# Altium PCB rpi_adapter_mipi_in_out.PcbDoc (part 1 of 2)
Units mil, origin at the board's own origin, x right, y up, seen from the top; angles counter-clockwise.
Board outline 1339.12 x 1250 mil, 4 copper layers (Top Layer, L02_GND, L03_GND, Bottom Layer), stack 36.268 mil thick; 12 components, 26 nets, 96 pads, 205 vias.
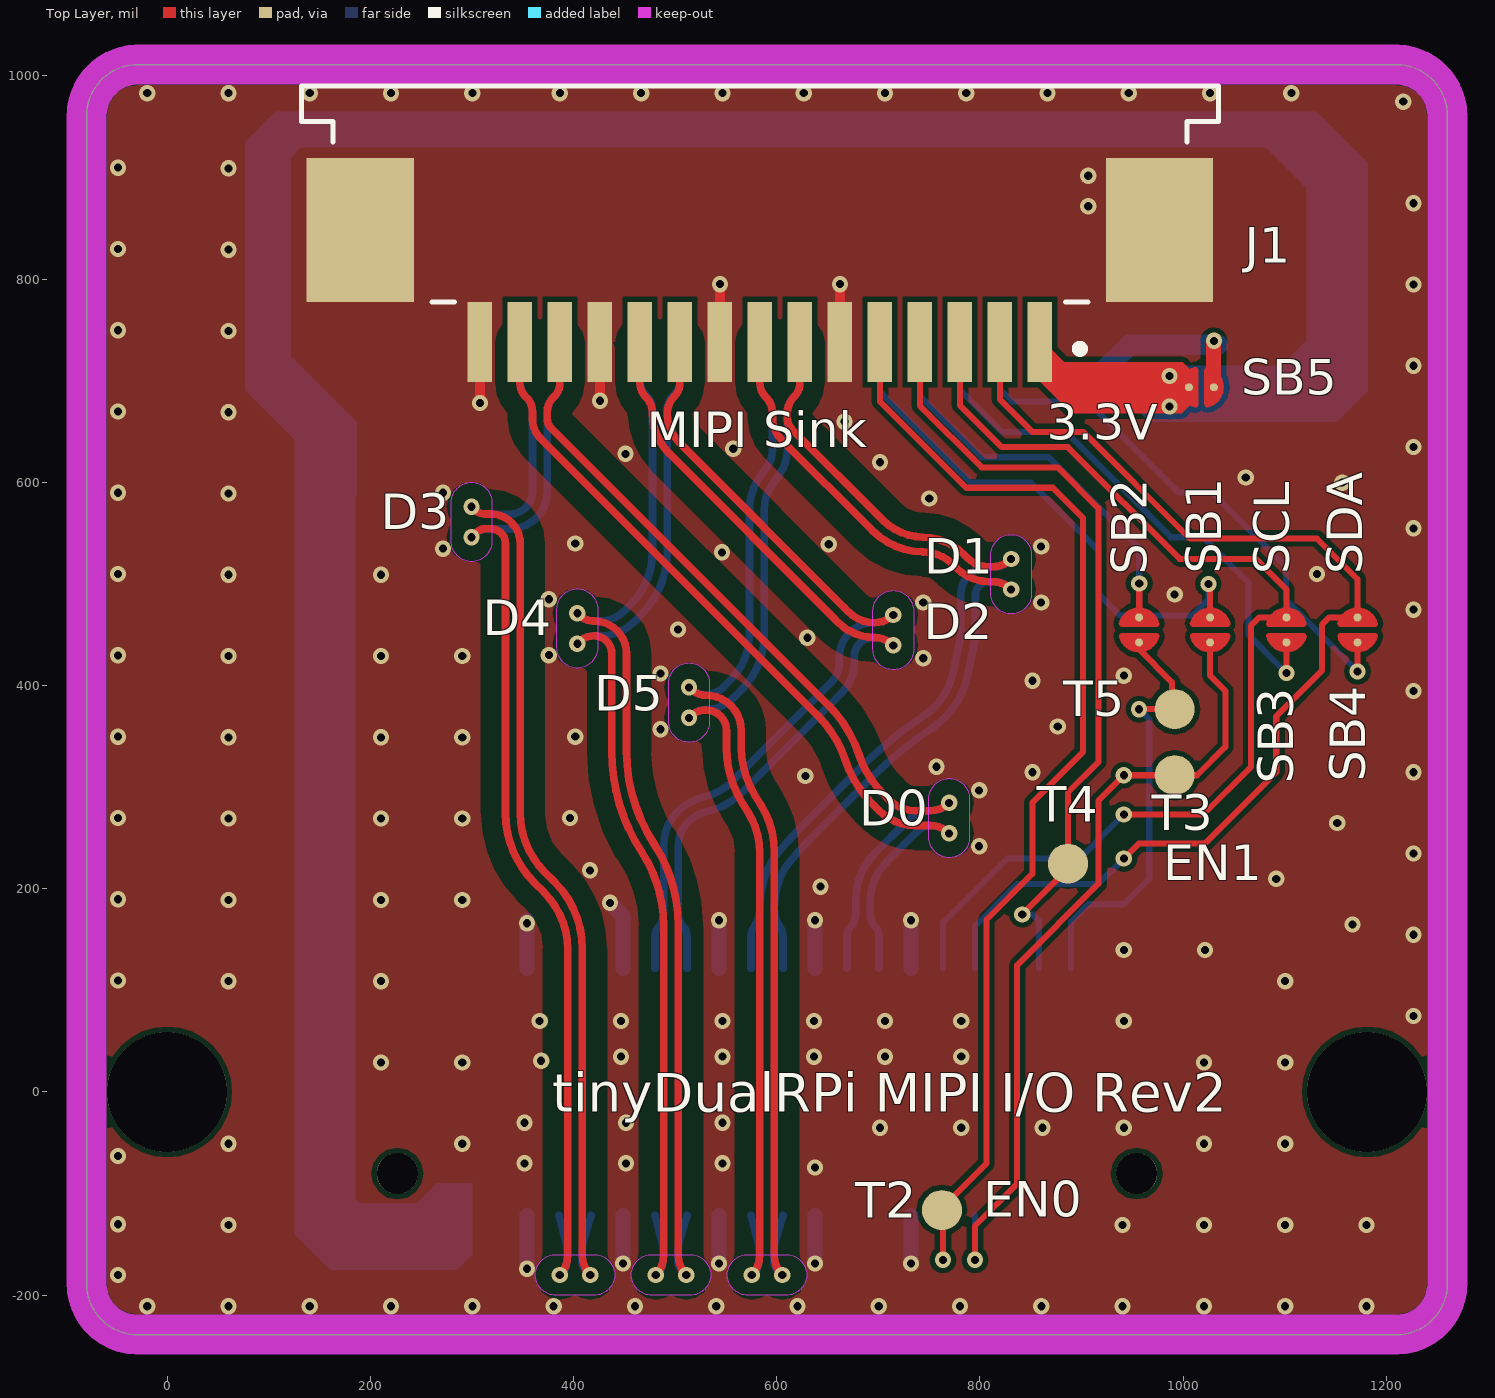
[diagram p0: Top Layer view]
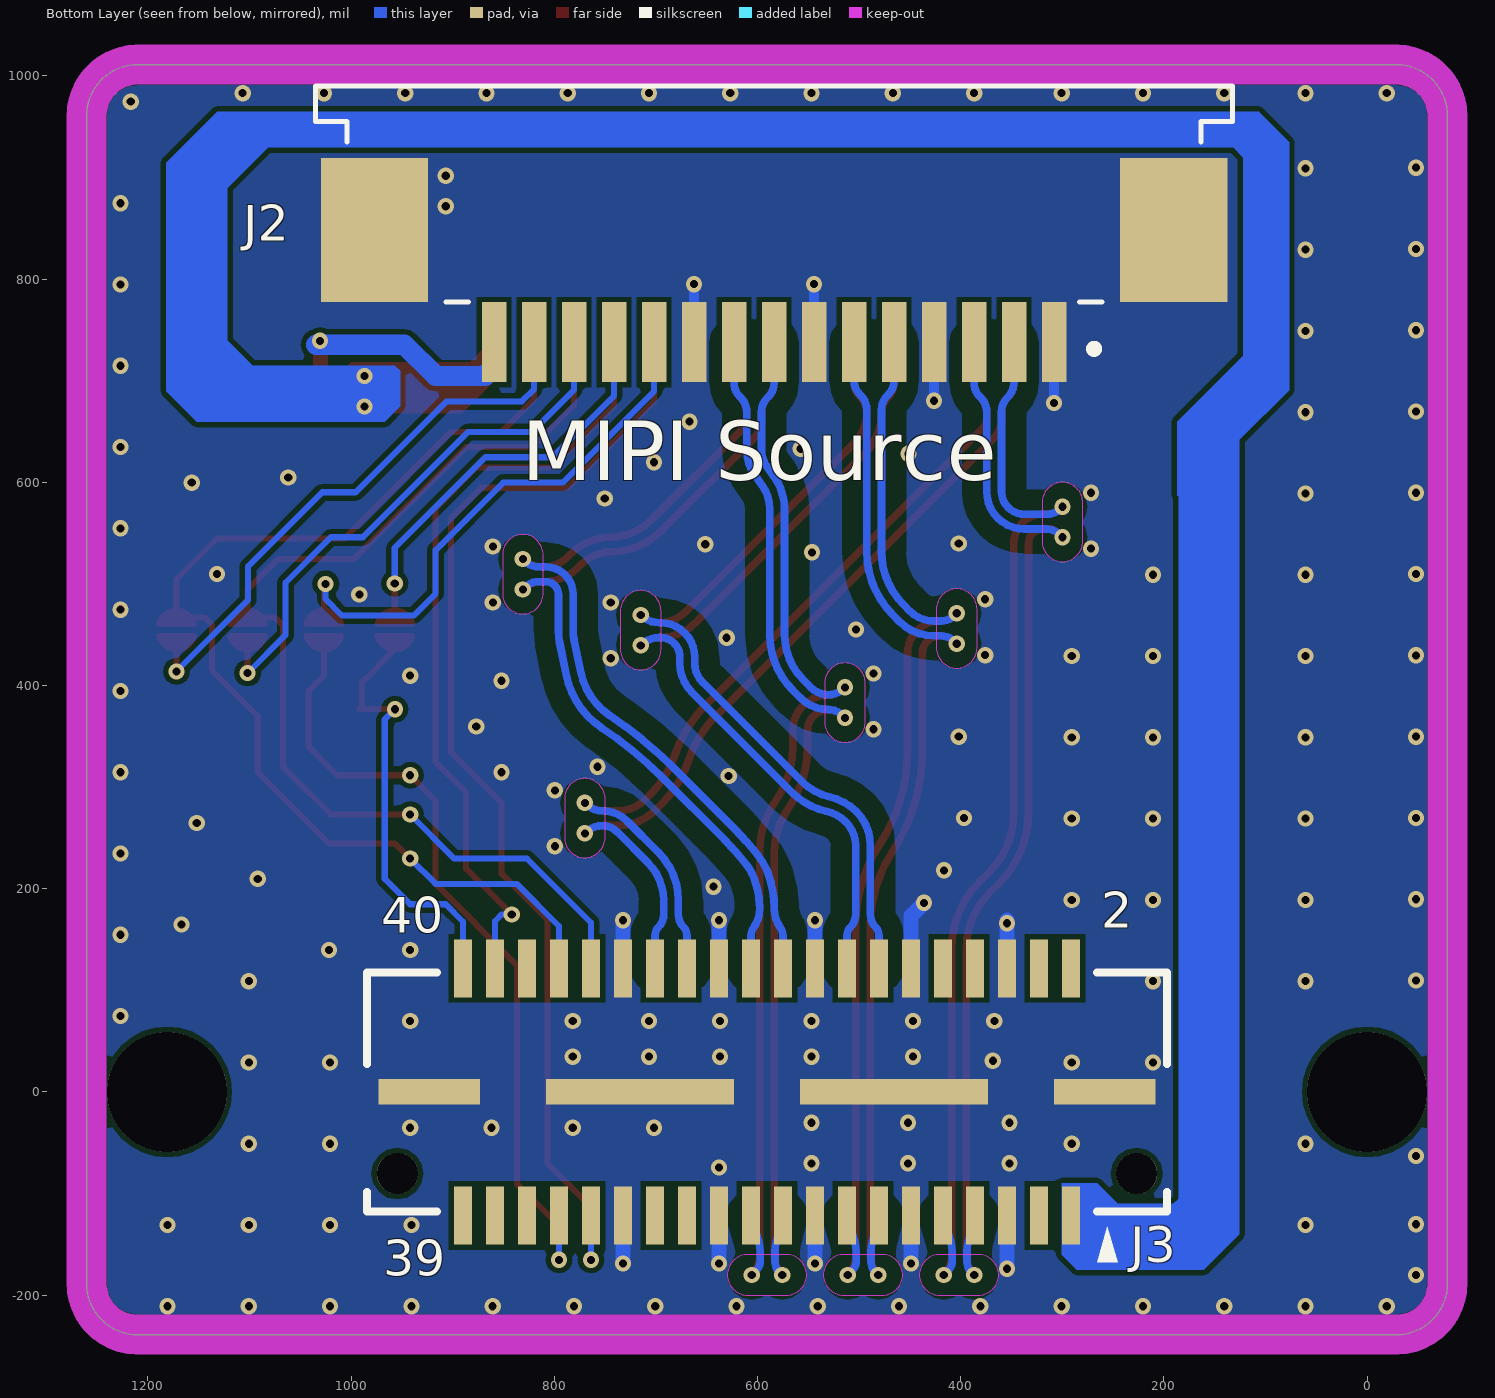
[diagram p1: Bottom Layer view, seen from below]
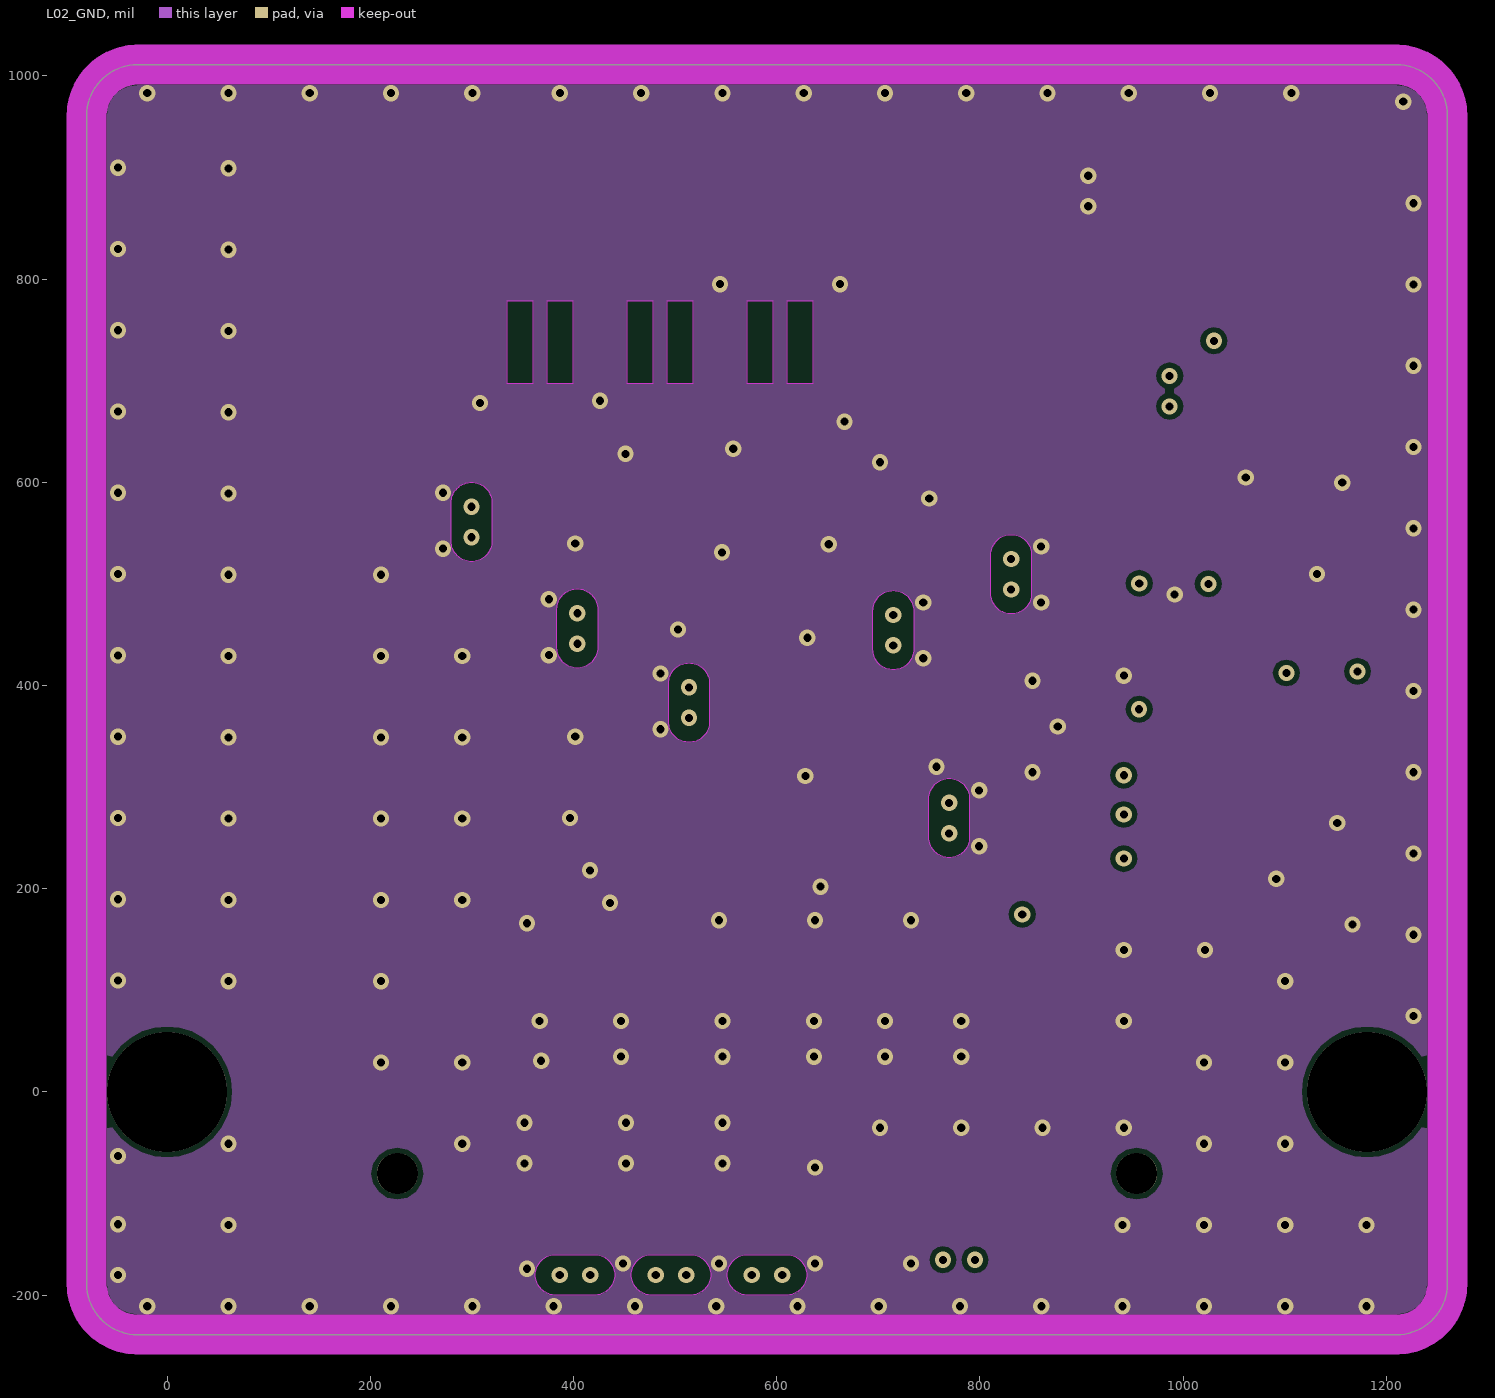
[diagram p2: L02_GND]
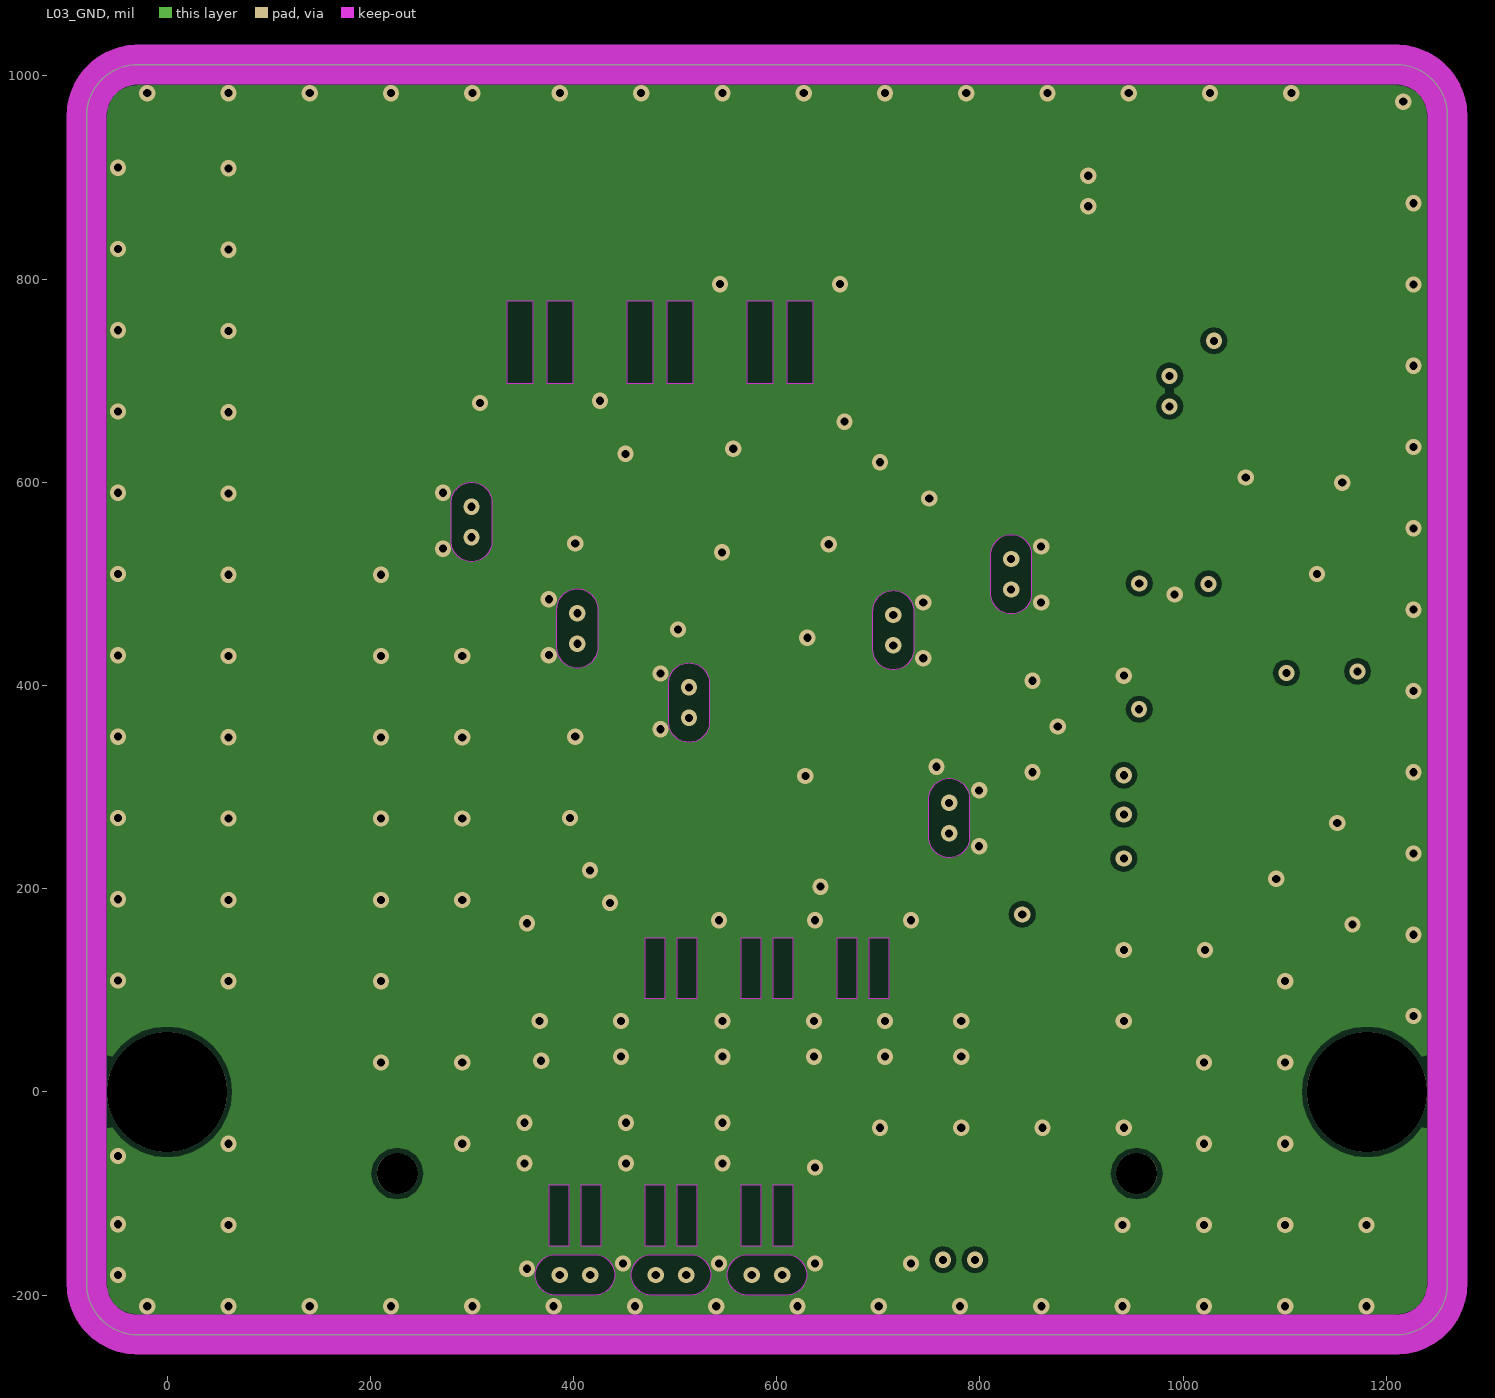
[diagram p3: L03_GND]

## Layer stack, top to bottom
Top Solder: solder mask 1, SM-001, Dk 4
Top Layer: signal copper 1.378
Dielectric 1: prepreg 8.2835, 7628*1, Dk 4.05
L02_GND: signal copper 0.5984
Dielectric 2: core 15.748, Core, Dk 4.05
L03_GND: signal copper 0.5984
Dielectric 3: prepreg 8.2835, 7628*1, Dk 4.05
Bottom Layer: signal copper 1.378
Bottom Solder: solder mask 1, SM-001, Dk 4

## Board outline
-79.01,-188.99 ccw(c-29.01,-188.99) -29.01,-238.99 1210.11,-238.99 ccw(c1210.11,-188.99) 1260.11,-188.99 1260.11,961.01 ccw(c1210.11,961.01) 1210.11,1011.01 -29.01,1011.01 ccw(c-29.01,961.01) -79.01,961.01

## Design rules (kind name [scope] priority, off if disabled: settings)
BoardOutlineClearance [(IsPolygon OR IsTrack) AND IsNet] p1: gap=20 ignorepadtopadclearanceinfootprint=FALSE
Clearance Clearance_MIPI [InNetClass('MIPI')] p1: gap=5 ignorepadtopadclearanceinfootprint=TRUE except(20: Arc-Poly Track-Poly)
Clearance Clearance_Keepout [IsKeepOut] p2: gap=0.01 ignorepadtopadclearanceinfootprint=TRUE
Clearance Clearance_Poly [(IsTrack or IsArc) and InAnyDifferentialPair vs InNet('GND')    and InPoly] p3: gap=25 ignorepadtopadclearanceinfootprint=TRUE
Clearance Clearance_FID [InComponent('Designator1') OR InComponent('Designator2') OR InComponent('Designator3') OR InComponent('Designator4') OR InComponent('Designator5') OR InComponent('Designator6')] p4: gap=6 ignorepadtopadclearanceinfootprint=TRUE except(0: Arc-Arc; 5: Arc-Fill Arc-Poly Arc-Region Track-Fill Track-Poly Track-Region SMDPad-Fill SMDPad-Poly SMDPad-Region Via-Fill Via-Poly Via-Region; 5.98: Arc-Track)
Clearance [All] p5: gap=5 ignorepadtopadclearanceinfootprint=TRUE
ComponentClearance [All] p1 off: gap=5 collisioncheckmode=3 verticalgap=10 showdistances=FALSE
DiffPairsRouting [All] p1: maxlimit=7 minlimit=7 mostfreqgap=7 toplayer_minwidth=7.55 toplayer_maxwidth=7.55 toplayer_prefwidth=7.55 midlayer1_minwidth=7.55 midlayer1_maxwidth=7.55 midlayer1_prefwidth=7.55 midlayer2_minwidth=7.55 midlayer2_maxwidth=7.55 midlayer2_prefwidth=7.55 bottomlayer_minwidth=7.55 bottomlayer_maxwidth=7.55 bottomlayer_prefwidth=7.55 maxuncoupledlength=500
Height [All] p1 off: minheight=0 maxheight=1000 prefheight=500
HoleSize [All] p1: absolutevalues=TRUE maxlimit=120 minlimit=1 maxpercent=80.000 minpercent=20.000
MatchedLengths MatchedLengths_CAM [InDifferentialPairClass('CAM0') or InDifferentialPairClass('CAM1')] p1: tolerance=5 checknetsindiffpair=TRUE checkdiffpairvsdiffpair=FALSE checkxsignals=FALSE checkothers=FALSE
MinimumSolderMaskSliver [All] p1: minsoldermaskwidth=1.5
PlaneClearance [All] p1: clearance=10
PolygonConnect PolygonConnect_1 [InNet('VDD_IR')] p1: connectstyle=Direct reliefconductorwidth=10 reliefentries=4 polygonreliefangle="90 Angle" airgapwidth=10
PolygonConnect [All] p2: thpad.connectstyle=Relief thpad.reliefconductorwidth=10 thpad.reliefentries=4 thpad.polygonreliefangle="90 Angle" thpad.airgapwidth=10 smdpad.connectstyle=Direct smdpad.reliefconductorwidth=10 smdpad.reliefentries=4 smdpad.polygonreliefangle="90 Angle" smdpad.airgapwidth=10 via.connectstyle=Direct via.reliefconductorwidth=10 via.reliefentries=4 via.polygonreliefangle="90 Angle" via.airgapwidth=10
RoomDefinition rpi_adapter_mipi_in_out [InComponentClass('rpi_adapter_mipi_in_out')] p1 off: confinementstyle=ConfineIn formatcopy=TRUE lockcomponents=FALSE outline 423.28,-538.96 3809.28,-538.96 3809.28,1510.04 423.28,1510.04
RoutingVias [All] p1: holewidth=8 width=16 viastyle="Through Hole" minholewidth=8 minwidth=16 maxholewidth=8 maxwidth=16
ShortCircuit [IsNet] p1: allowed=FALSE
SilkToSilkClearance [All] p1: silktosilkclearance=1
SilkToSolderMaskClearance [IsPad] p1: minsilkscreentomaskgap=1 clearancetoexposedcopper=TRUE
SolderMaskExpansion SolderMaskExpansion_via [IsVia] p1: expansion=3 istentingtop=FALSE
SolderMaskExpansion [All] p2: expansion=2.5 istentingtop=FALSE
Width [All] p1: maxlimit=50 minlimit=6 preferedwidth=6
21 further rules are at their usual default settings.

## Classes and differential pairs
differential pair class MIPI: MIPI_CLK MIPI_D0 MIPI_D1
net class MIPI: DIFF0_N DIFF0_P DIFF1_N DIFF1_P DIFF2_N DIFF2_P DIFF3_N DIFF3_P DIFF4_N DIFF4_P DIFF5_N DIFF5_P
differential pair DIFF5: +DIFF5_P -DIFF5_N
differential pair DIFF4: +DIFF4_P -DIFF4_N
differential pair DIFF3: +DIFF3_P -DIFF3_N
differential pair DIFF2: +DIFF2_P -DIFF2_N
differential pair DIFF1: +DIFF1_P -DIFF1_N
differential pair DIFF0: +DIFF0_P -DIFF0_N
differential pair MIPI_D1: +"" -""
differential pair MIPI_D0: +"" -""
differential pair MIPI_CLK: +"" -""

## Components (designator, comment, footprint, x,y, rotation, side; value= is the part's Value field where it differs from the comment)
J1 "1-84953-5" TE_1-84953-5 583.56,738.02 r180 top
J2 "1-84953-5" TE_1-84953-5 583.56,738.02 r0 bottom
J3 "QTE-020-01-F-D-A-K" SAMTEC_QTE-020-01-X-D-A 590.55,0 r0 bottom locked
SB1 "Solderbridge" Solderbridge 1026.77,454.68 r90 top
SB2 "Solderbridge" Solderbridge 956.77,454.68 r90 top
SB3 "Solderbridge" Solderbridge 1101.77,454.68 r270 top
SB4 "Solderbridge" Solderbridge 1171.77,454.68 r270 top
SB5 "Solderbridge" Solderbridge 1018.11,693.59 r0 top
T2 "TP_S" "TP 1mm" 762.77,-116.32 r0 top
T3 "TP_S" "TP 1mm" 991.77,311.68 r0 top
T4 "TP_S" "TP 1mm" 886.77,224.68 r0 top
T5 "TP_S" "TP 1mm" 991.77,376.68 r0 top

## Footprints (in the part's own frame and the unit in brackets; to place one, negate y for a bottom-side part, rotate by r counter-clockwise, add the part's x,y. Pads: shape width x height; smd on the part's side, far side on the other; paste and mask are expansions set on the pad)
SAMTEC_QTE-020-01-X-D-A [mm]
  rect 0.46x1.45 smd: 01(-7.6,3.09) 02(-7.6,-3.09) 03(-6.8,3.09) 04(-6.8,-3.09) 05(-6,3.09) 06(-6,-3.09) 07(-5.2,3.09) 08(-5.2,-3.09) 09(-4.4,3.09) 10(-4.4,-3.09) 11(-3.6,3.09) 12(-3.6,-3.09) 13(-2.8,3.09) 14(-2.8,-3.09) 15(-2,3.09) 16(-2,-3.09) 17(-1.2,3.09) 18(-1.2,-3.09) 19(-0.4,3.09) 20(-0.4,-3.09) 21(0.4,3.09) 22(0.4,-3.09) 23(1.2,3.09) 24(1.2,-3.09) 25(2,3.09) 26(2,-3.09) 27(2.8,3.09) 28(2.8,-3.09) 29(3.6,3.09) 30(3.6,-3.09) 31(4.4,3.09) 32(4.4,-3.09) 33(5.2,3.09) 34(5.2,-3.09) 35(6,3.09) 36(6,-3.09) 37(6.8,3.09) 38(6.8,-3.09) 39(7.6,3.09) 40(7.6,-3.09)
  rect 2.54x0.64 smd: G1(-8.445,0) G4(8.445,0)
  rect 4.7x0.64 smd: G2(-3.175,0) G3(3.175,0)
  round 1.02 hole 1.02 unplated: ""(-9.24,2.04) ""(9.24,2.04)
  silkscreen extent -10,-2.98 10,4.25, body extent -10.01,-3.56 10.01,3.56, height 4.26
Solderbridge [mm]
  round 0.2 smd paste-10: 1(-0.312,0) 2(0.312,0)
  Top Layer region: 0.077,0.432 0.152,0.505 0.271,0.467 0.335,0.424 0.409,0.351 0.462,0.292 0.521,0.193 0.549,0.099 0.544,-0.122 0.518,-0.193 0.434,-0.33 0.351,-0.411 0.259,-0.469 0.157,-0.5 0.107,-0.483 0.077,-0.43
  Top Layer region: -0.077,-0.432 -0.152,-0.505 -0.271,-0.467 -0.335,-0.424 -0.409,-0.351 -0.462,-0.292 -0.521,-0.193 -0.549,-0.099 -0.544,0.122 -0.518,0.193 -0.434,0.33 -0.351,0.411 -0.259,0.469 -0.157,0.5 -0.107,0.483 -0.077,0.43
  Top Layer lines w0.152: -0.153,0.431 ccw(c-0.042,0) -0.487,0 ccw(c-0.042,0) -0.153,-0.431 ; 0.153,0.431 cw(c0.042,0) 0.153,-0.431
TE_1-84953-5 [mm]
  rect 0.61x2 smd: 1(-7,0) 2(-6,0) 3(-5,0) 4(-4,0) 5(-3,0) 6(-2,0) 7(-1,0) 8(0,0) 9(1,0) 10(2,0) 11(3,0) 12(4,0) 13(5,0) 14(6,0) 15(7,0)
  rect 2.68x3.6 smd: M1(-9.99,-2.8) M2(9.99,-2.8)
  silkscreen extent -11.46,-6.4 11.46,0.27, body extent -11.46,-6.4 11.46,0.15, height 2.56
"TP 1mm" [mm] "1 mm Probe Pad"
  round 1 smd: 1(0,0)

## Part data
J1 J2: library part "FPC - 15P - 2MP", "Conn FPC Connector SKT 15 POS 1mm Solder RA SMD T/R", Actuator Color=Black, Contact Current Rating=1A, Flammability Rating="UL94 V-0", Housing Color=Natural, Manufacturer="TE Connectivity", Max Operating Temperature=85°C, Max Voltage Rating (AC)=200V, Min Operating Temperature=-40°C, Package Quantity=1200, Supplier Part Number 1=A101405CT-ND, Actuator Material=Nylon,Glass,Polyamide, Category="FFC / FPC", ComponentLink1Description=https://datasheet.ciiva.com/669/eng-cd-84953-a3-669110.pdf?src-supplier=Digi-Key, ComponentLink1URL=https://datasheet.ciiva.com/669/eng-cd-84953-a3-669110.pdf?src-supplier=Digi-Key, ComponentLink2Description=https://datasheet.ciiva.com/669/eng-cd-84953-a3-669111.pdf?src-supplier=Digi-Key, ComponentLink2URL=https://datasheet.ciiva.com/669/eng-cd-84953-a3-669111.pdf?src-supplier=Digi-Key, ComponentLink3Description=https://datasheet.ciiva.com/669/eng-cd-84953-a3-669112.pdf?src-supplier=Digi-Key, ComponentLink3URL=https://datasheet.ciiva.com/669/eng-cd-84953-a3-669112.pdf?src-supplier=Digi-Key, Connector System=Flex-to-Board, Connector Type=Receptacle,Connector,Socket, Contact Location=Top, Contact Material=Bronze, Contact Plating=Tin,Bright, Current Rating=1A, Depth=7.3mm, ELV=Compliant, Gender=Receptacle, Height=2.56mm, Housing Material=Polymer, Length=22.92mm, Manufacturer Part Number=1-84953-5, Mating Alignment="Yes (With)", Mount="Surface Mount", Number of Contacts=15, Number of Positions=15, Number of Rows=1, Orientation="Right Angle", Packaging="Tape and Reel", PCB Mount Alignment="No (Without)", PCB Mount Retention=With, PCB Mounting Orientation="Right Angle", Pitch=0.039inch, Plating Thickness=2um, Pricing 1="1=1.02000, 10=0.97700, 25=0.93400, 50=0.92100, 100=0.80470, 250=0.77460, 500=0.73158 (USD)", Radiation Hardening=No, RoHS=Yes, RoHS Compliant=Yes, Sealable="No (Without)", Series=FPC, Shielding=Unshielded, Shrouded="Yes (With)", Stock 1=9836, Supplier 1=Digi-Key, Termination=SMD/SMT, Voltage Rating=200V, Width=0.2575inch, Wire/Cable Type="Flat Flex"
J3: library part QSE-020-01-F-D-A-K, "Q Strip® High-Speed Ground Plane Header, 0.80mm Pitch", Manufacturer=Samtec, Manufacturer Part Number=QTE-020-01-F-D-A, Package Quantity=1, Supplier Part Number 1=SAM8846-ND, Category="Board to Board Connectors", ComponentLink1Description=https://datasheet.ciiva.com/6924/qte-xxx-xx-x-d-xxx-mkt-6924765.pdf?src-supplier=Digi-Key, ComponentLink1URL=https://datasheet.ciiva.com/6924/qte-xxx-xx-x-d-xxx-mkt-6924765.pdf?src-supplier=Digi-Key, Contact Plating=Gold, Gender=Male, Mated Stacking Heights=5mm, Mounting Technology="Surface Mount", Number of Contacts=40, Number of Positions=40, Number of Rows=2, Packaging=Tray, Pitch=0.031inch, Pricing="1=5.61000, 10=5.09400, 25=4.82480, 40=4.71275, 80=4.48825, 230=3.92726, 440=3.81505, 945=3.25402, 2400=3.02960 (USD)", RoHS=Yes, RoHS Compliant=Yes, Series="QStrip® QTE", Stock=179, Supplier 1=Digi-Key, Termination=Solder
T2 T3 T4 T5: "test point"
SB1 SB2 SB3 SB4 SB5: Artikkelnr Noca=N.A., Artikkelnr Simpro=N.A., Footprint Doc=Solderbridge, LatestRevisionDate=2009-12-14, Part Number=Solderbridge, Pin Count=2, Published=2009-12-14, Publisher="Nordic Semiconductor"

## Free pads (board coordinates)
  round 118.11 hole 118.11 unplated: 0(0,0) 0(1181.1,0)

## Via types
v1: diameter 16, hole 8, Top Layer to Bottom Layer, tented both sides, 205 vias

## Nets (pads, with @x,y where several pads share a name; then routed paths per layer and width w, separated by ;. In a path a pad name is that pad's centre, name@x,y a point inside that pad or via, vN(x,y) a via of type N, cw(c..) or ccw(c..) an arc to the next point about the centre after c; other vN are vias at no path point)
DIFF0_N: J1.14 J3.28 | length 862.4
  Top Layer w7.55: J1.14@347.33,738.02 347.33,697.9 ccw(c366.69,697.91) 353,684.22 354.07,683.15 cw(c340.38,669.46) 359.41,673.04 cw(c340.38,669.45) 359.74,669.45 359.74,662.15 ccw(c386.33,662.15) 367.53,643.35 640.67,370.21 cw(c561.64,291.17) 667.61,326.7 ccw(c773.59,362.23) 694.55,283.2 700.82,276.93 ccw(c736.28,312.39) 736.28,262.24 751.2,262.24 cw(c751.2,235.87) v1(769.85,254.51)
  Bottom Layer w7.55: J3.28@700.79,121.65 700.78,153.73 ccw(c688.16,153.73) 697.08,162.66 cw(c708.63,174.2) 692.3,174.2 692.3,188.51 cw(c744.33,188.51) 707.54,225.3 738.63,256.38 cw(c752.28,242.73) 752.28,262.04 cw(c752.28,237.8) 769.42,254.94 v1(769.85,254.51)
DIFF0_P: J1.13 J3.26 | length 862.6
  Top Layer w7.55: J1.13@386.7,738.02 386.69,697.9 cw(c367.33,697.91) 381.02,684.22 379.97,683.16 ccw(c393.68,669.45) 375.45,676.07 ccw(c393.68,669.46) 374.29,669.45 374.29,662.15 ccw(c386.33,662.15) 377.82,653.64 650.96,380.5 cw(c561.64,291.17) 681.41,331.33 ccw(c773.59,362.23) 704.84,293.49 711.11,287.22 ccw(c736.28,312.39) 736.28,276.79 751.2,276.79 ccw(c751.2,303.16) v1(769.85,284.51)
  Bottom Layer w7.55: J3.26@669.29,121.65 669.28,153.74 cw(c681.92,153.74) 672.98,162.66 ccw(c661.43,174.2) 677.75,174.2 677.75,188.51 cw(c744.33,188.51) 697.25,235.59 728.34,266.67 cw(c752.28,242.73) 752.28,276.59 ccw(c752.28,299.89) 768.76,283.41 v1(769.85,284.51)
DIFF1_N: J1.8 J3.22 | length 872.7
  Top Layer w7.55: J1.8@583.56,738.02 583.55,697.9 ccw(c602.91,697.91) 589.22,684.22 cw(c572.98,667.97) 595.95,667.97 595.95,663.25 ccw(c626.01,663.25) 604.76,641.99 694.11,552.64 ccw(c745.19,603.71) 744.06,531.49 cw(c743.39,488.37) 773.89,518.86 777.21,515.54 ccw(c809.32,547.65) 809.32,502.24 812.2,502.24 cw(c812.2,475.87) v1(830.85,494.51)
  Bottom Layer w7.55: J3.22@606.3,121.65 606.29,153.73 ccw(c593.67,153.73) 603.97,161.03 cw(c631.29,180.38) 597.81,180.38 cw(c682.78,180.38) 603,209.62 cw(c653.53,191.1) 611.34,224.51 cw(c824.64,55.8) 632.34,248.1 694.71,310.47 cw(c962.97,42.2) 753.04,358.21 ccw(c707.38,426.93) 788.26,410.62 794.8,443.01 ccw(c743.35,453.39) 795.83,453.39 795.83,489.61 cw(c808.46,489.61) 808.46,502.23 815.28,502.23 cw(c815.28,483.3) 828.67,496.69 v1(830.85,494.51)
DIFF1_P: J1.7 J3.20 | length 872.8
  Top Layer w7.55: J1.7@622.93,738.02 622.91,697.9 cw(c603.55,697.91) 617.24,684.22 ccw(c633.51,667.94) 610.5,667.97 610.5,663.25 ccw(c626.01,663.25) 615.05,652.28 704.4,562.92 ccw(c745.19,603.71) 744.29,546.04 cw(c743.39,488.37) 784.18,529.15 787.5,525.83 ccw(c809.32,547.65) 809.32,516.79 812.2,516.79 ccw(c812.2,543.16) v1(830.85,524.51)
  Bottom Layer w7.55: J3.20@574.8,121.65 574.79,153.74 cw(c587.42,153.74) 577.11,161.03 ccw(c549.77,180.38) 583.26,180.38 cw(c682.78,180.38) 589.34,214.63 cw(c653.53,191.1) 599.93,233.54 cw(c824.64,55.8) 622.06,258.39 684.42,320.76 cw(c962.97,42.2) 744.99,370.33 ccw(c707.38,426.93) 774,413.49 780.53,445.89 ccw(c743.35,453.39) 781.28,453.39 781.28,489.61 cw(c808.46,489.61) 808.46,516.78 815.28,516.78 ccw(c815.28,535.72) 828.67,522.33 v1(830.85,524.51)
DIFF2_N: J1.11 J3.16 | length 851.8
  Top Layer w7.55: J1.11@465.44,738.02 465.45,697.91 ccw(c484.81,697.92) 471.12,684.23 cw(c454.88,667.98) 477.85,667.98 ccw(c533.57,667.98) 494.17,628.58 655.99,466.76 660.88,461.87 ccw(c696.2,497.2) 696.2,447.24 cw(c696.2,420.87) v1(714.85,439.51)
  Bottom Layer w7.55: J3.16@511.81,121.65 511.81,153.73 ccw(c499.19,153.73) 508.11,162.66 cw(c519.66,174.2) 503.33,174.2 503.33,242.72 cw(c535.61,242.72) 512.78,265.54 cw(c541.26,237.07) 532.41,276.35 ccw(c517.16,344.03) 566.22,294.98 664.26,393.02 ccw(c635.24,422.04) 676.28,422.04 676.28,428.04 cw(c695.48,428.04) 695.48,447.23 696.2,447.23 cw(c696.2,420.86) v1(714.85,439.51)
DIFF2_P: J1.10 J3.14 | length 851.8
  Top Layer w7.55: J1.10@504.81,738.02 504.81,697.91 cw(c485.45,697.92) 499.14,684.23 ccw(c515.41,667.95) 492.4,667.98 ccw(c533.57,667.98) 504.46,638.87 666.28,477.05 671.17,472.16 ccw(c696.2,497.2) 696.2,461.79 ccw(c696.2,488.16) v1(714.85,469.51)
  Bottom Layer w7.55: J3.14@480.32,121.65 480.31,153.74 cw(c492.94,153.74) 484.01,162.66 ccw(c472.46,174.2) 488.78,174.2 488.78,242.72 cw(c535.61,242.72) 502.5,275.83 cw(c541.26,237.07) 529.21,290.55 ccw(c517.16,344.03) 555.93,305.26 653.97,403.31 ccw(c635.24,422.04) 661.73,422.04 661.73,428.04 cw(c695.48,428.04) 695.48,461.78 696.2,461.78 ccw(c696.2,488.16) v1(714.85,469.51)
DIFF3_N: J2.2 J3.09 | length 1094.4
  Top Layer w7.55: v1(299.77,575.95) 302.46,573.27 ccw(c313.28,584.09) 313.28,568.79 318.62,568.78 cw(c318.62,539.64) 347.77,539.64 347.77,274.43 ccw(c429.98,274.44) 371.85,216.3 381.53,206.62 cw(c315.57,140.66) 408.85,140.66 408.85,-161.44 ccw(c435.24,-161.44) v1(416.58,-180.11)
  Bottom Layer w7.55: v1(299.77,575.95) 301.73,573.99 ccw(c314.79,587.05) 314.79,568.58 337.29,568.58 ccw(c337.29,591.04) 359.75,591.04 359.75,669.45 ccw(c340.39,669.45) 354.08,683.14 cw(c370.35,699.41) 347.34,699.41 J2.2@347.34,738.02 ; v1(416.58,-180.11) 411.92,-175.44 cw(c420.6,-166.76) 408.32,-166.76 408.32,-157.74 cw(c446.07,-157.74) 409.85,-147.11 J3.09@417.32,-121.65
DIFF3_P: J2.3 J3.07 | length 1094.6
  Top Layer w7.55: v1(299.77,545.95) 304.35,550.54 cw(c313.28,541.61) 313.28,554.23 318.62,554.23 cw(c318.62,539.64) 333.22,539.64 333.22,274.43 ccw(c429.98,274.43) 361.56,206.02 371.24,196.34 cw(c315.57,140.66) 394.3,140.66 394.3,-161.47 cw(c367.94,-161.47) v1(386.58,-180.11)
  Bottom Layer w7.55: v1(299.77,545.95) 302.07,548.25 cw(c316.03,534.29) 316.03,554.03 337.29,554.03 ccw(c337.29,591.04) 374.3,591.04 374.3,669.45 cw(c393.66,669.45) 379.97,683.14 381.04,684.2 ccw(c367.35,697.89) 386.71,697.89 J2.3@386.71,738.02 ; J3.07@385.83,-121.65 392.56,-147.65 cw(c356.02,-157.13) 393.77,-157.13 393.77,-167.32 cw(c380.25,-167.32) 389.81,-176.87 v1(386.58,-180.11)
DIFF4_N: J2.5 J3.15 | length 1082.8
  Top Layer w7.55: v1(403.85,471.15) 405.41,469.6 ccw(c420.3,484.49) 420.3,463.43 cw(c420.3,431.45) 452.28,431.45 452.28,335 ccw(c618.16,335) 479.32,244.23 cw(c355.99,163.59) 503.34,163.59 503.34,-161.44 ccw(c529.73,-161.44) v1(511.07,-180.11)
  Bottom Layer w7.55: v1(403.85,471.15) 406.13,468.88 ccw(c419.28,482.03) 419.28,463.43 426.28,463.42 ccw(c426.28,496.76) 449.85,473.19 455.99,479.33 ccw(c403.2,532.12) 477.86,532.12 477.86,671.66 ccw(c458.5,671.66) 472.19,685.35 471.12,686.42 cw(c484.81,700.11) 465.45,700.11 J2.5@465.45,738.02 ; v1(511.07,-180.11) 506.41,-175.44 cw(c515.09,-166.76) 502.81,-166.76 502.81,-157.74 cw(c540.56,-157.74) 504.34,-147.11 J3.15@511.81,-121.65
DIFF4_P: J2.6 J3.13 | length 1082.1
  Top Layer w7.55: v1(403.85,441.15) 405.41,442.71 cw(c420.3,427.82) 420.3,448.88 cw(c420.3,431.45) 437.73,431.45 437.73,335 ccw(c618.16,335) 467.14,236.27 cw(c355.99,163.59) 488.79,163.59 488.79,-161.47 cw(c462.43,-161.47) v1(481.07,-180.11)
  Bottom Layer w7.55: v1(403.85,441.15) 406.13,443.42 cw(c419.28,430.27) 419.28,448.87 426.28,448.87 ccw(c426.28,496.76) 460.14,462.9 466.28,469.04 ccw(c403.2,532.12) 492.41,532.12 492.41,671.66 cw(c511.77,671.66) 498.08,685.35 499.15,686.42 ccw(c485.46,700.11) 504.82,700.11 J2.6@504.82,738.02 ; J3.13@480.32,-121.65 487.05,-147.65 cw(c450.51,-157.13) 488.26,-157.13 488.26,-167.32 cw(c474.74,-167.32) 484.3,-176.87 v1(481.07,-180.11)
DIFF5_N: J2.8 J3.21 | length 1075.1
  Top Layer w7.55: v1(513.83,398.18) 515.39,396.63 ccw(c530.28,411.52) 530.28,390.46 cw(c530.28,355.46) 565.28,355.46 565.28,338.95 ccw(c654.56,338.95) 579.05,291.32 584.05,283.39 cw(c508.54,235.75) 597.82,235.75 597.82,-161.44 ccw(c624.21,-161.44) v1(605.55,-180.11)
  Bottom Layer w7.55: v1(513.83,398.18) 514.58,397.44 ccw(c530.28,413.14) 530.28,390.93 ccw(c530.28,414.81) 547.17,397.92 554.78,405.54 ccw(c510.12,450.2) 573.28,450.2 573.28,573.53 cw(c628.37,573.53) 583.26,605.15 591.26,616.56 ccw(c569.98,631.48) 595.97,631.48 595.97,669.45 ccw(c576.61,669.45) 590.3,683.14 589.23,684.21 cw(c602.92,697.9) 583.56,697.9 J2.8@583.56,738.02 ; v1(605.55,-180.11) 600.89,-175.44 cw(c609.57,-166.76) 597.29,-166.76 597.29,-157.74 cw(c635.04,-157.74) 598.82,-147.11 J3.21@606.3,-121.65
DIFF5_P: J2.9 J3.19 | length 1074.8
  Top Layer w7.55: v1(513.83,368.18) 515.39,369.74 cw(c530.28,354.85) 530.28,375.91 cw(c530.28,355.46) 550.73,355.46 550.73,338.95 ccw(c654.56,338.95) 566.75,283.55 571.75,275.63 cw(c508.54,235.75) 583.27,235.75 583.27,-161.47 cw(c556.91,-161.47) v1(575.55,-180.11)
  Bottom Layer w7.55: v1(513.83,368.18) 516.2,370.55 cw(c530.28,356.46) 530.28,376.38 ccw(c530.28,414.81) 557.45,387.63 560.35,390.53 565.07,395.25 ccw(c510.12,450.2) 587.83,450.2 587.83,573.53 cw(c628.37,573.53) 595.18,596.8 603.18,608.21 ccw(c569.98,631.48) 610.52,631.48 610.52,669.45 cw(c629.88,669.45) 616.19,683.14 617.26,684.21 ccw(c603.57,697.9) 622.93,697.9 J2.9@622.93,738.02 ; J3.19@574.8,-121.65 581.54,-147.66 cw(c544.99,-157.12) 582.74,-157.12 582.74,-167.32 cw(c569.22,-167.32) 578.78,-176.87 v1(575.55,-180.11)
EN_0: J1.5 J3.31 T2.1 | length 1138.5
  Top Layer w6: J1.5@701.67,738.02 701.66,679.8 786.77,594.68 871.77,594.68 901.77,564.68 901.77,334.68 851.77,284.68 851.77,214.68 806.77,169.68 806.77,-70.32 761.77,-115.32 763.77,-117.32 v1(763.77,-165.32)
  Bottom Layer w6: v1@763.78,-165.31 J3.31@763.78,-121.65
EN_1: J3.33 SB1.1 T3.1 | length 801.9
  Top Layer w6: v1(795.27,-165.32) 795.27,-131.82 836.77,-90.32 836.77,124.68 916.77,204.68 916.77,286.68 v1(941.77,311.68) T3.1@991.77,311.68 1013.77,311.68 1041.77,339.68 1041.77,394.68 1026.77,409.68 SB1.1@1026.77,442.39
  Bottom Layer w6: v1(795.27,-165.32) J3.33@795.28,-121.65
GND: J1.6 J1.9 J1.12 J1.15 J1.M1 J1.M2 J2.1 J2.4 J2.7 J2.10 J2.M1 J2.M2 J3.05 J3.06 J3.11 J3.12 J3.17 J3.18 J3.23 J3.24 J3.29 J3.30 J3.G1 J3.G2 J3.G3 J3.G4 | length 964.5
  Top Layer w10: v1(307.97,678.05) J1.15@307.96,738.02 ; v1(426.08,680.24) J1.12@426.07,738.02 ; J1.9@544.18,738.02 v1(544.18,795.05) ; J1.6@662.3,738.02 v1(662.29,795.05)
  Bottom Layer w10: v1(307.97,678.05) J2.1@307.97,738.02 ; v1(426.08,680.24) J2.4@426.08,738.02 ; J2.7@544.19,738.02 v1(544.18,795.05) ; J2.10@662.3,738.02 v1(662.29,795.05)
  Bottom Layer w15: v1(354.33,-173.99) J3.05@354.33,-121.65 ; J3.06@354.34,121.65 v1@354.34,169.01 ; v1(436.09,186.05) 448.82,173.32 J3.12@448.82,121.65 ; v1(448.82,-168.99) J3.11@448.82,-121.65 ; v1(543.31,-168.99) J3.17@543.31,-121.65 ; J3.18@543.31,121.65 v1(543.31,169.01) ; v1(637.79,-168.99) J3.23@637.8,-121.65 ; J3.24@637.8,121.65 v1(637.79,169.01) ; v1(732.28,-168.99) J3.29@732.28,-121.65 ; J3.30@732.28,121.65 v1(732.28,169.01)
  other v1: -19.45,-210.99 60.55,-210.99 140.55,-210.99 220.55,-210.99 300.55,-210.99 380.55,-210.99 460.55,-210.99 540.55,-210.99 620.55,-210.99 700.55,-210.99 780.55,-210.99 860.55,-210.99 940.55,-210.99 1020.55,-210.99 1100.55,-210.99 1180.55,-210.99 -48.23,-180.32 60.55,-130.99 940.55,-130.99 1020.55,-130.99 1100.55,-130.99 1180.55,-130.99 -48.23,-130.32 637.78,-74.32 351.77,-70.32 451.77,-70.32 546.77,-70.32 -48.13,-63.12 60.55,-50.99 290.55,-50.99 1020.55,-50.99 1100.55,-50.99 701.77,-35.32 781.77,-35.32 861.77,-35.32 941.77,-35.32 351.77,-30.32 451.77,-30.32 546.77,-30.32 210.55,29.01 290.55,29.01 1020.55,29.01 1100.55,29.01 368.29,30.68 446.77,34.68 546.77,34.68 636.77,34.68 706.77,34.68 781.77,34.68 366.77,69.68 446.77,69.68 546.77,69.68 636.77,69.68 706.77,69.68 781.77,69.68 941.77,69.68 1226.77,74.68 60.55,109.01 210.55,109.01 1100.55,109.01 -48.23,109.68 941.77,139.68 1021.77,139.68 1226.77,154.68 1166.77,164.68 354.28,166.05 60.55,189.01 210.55,189.01 290.55,189.01 -48.23,189.68 643.28,202.05 1091.77,209.68 416.28,218.05 1226.77,234.68 799.38,241.8 1151.77,264.68 60.55,269.01 210.55,269.01 290.55,269.01 -48.23,269.68 396.77,269.68 799.38,296.8 628.28,311.05 851.77,314.68 1226.77,314.68 757.28,320.05 60.55,349.01 210.55,349.01 290.55,349.01 -48.23,349.68 401.77,349.68 485.83,356.91 876.77,359.68 1226.77,394.68 851.77,404.68 941.77,409.68 485.83,411.91 744.38,426.8 60.55,429.01 210.55,429.01 290.55,429.01 -48.23,429.68 375.85,429.89 630.28,447.05 502.89,455.2 1226.77,474.68 744.38,481.8 860.38,481.8 375.85,484.89 991.77,489.68 60.55,509.01 210.55,509.01 -48.23,509.68 1131.77,509.68 546.28,531.05 271.77,534.68 860.38,536.8 651.28,539.05 401.77,539.68 1226.77,554.68 750.28,584.05 60.55,589.01 -48.23,589.68 271.77,589.68 1156.77,599.68 1061.77,604.68 701.77,619.68 451.28,628.05 557.28,633.05 1226.77,634.68 666.77,659.68 60.55,669.01 -48.23,669.68 1226.77,714.68 60.55,749.01 -48.23,749.68 1226.77,794.68 60.55,829.01 -48.23,829.68 906.77,871.68 1226.77,874.68 906.77,901.68 60.55,909.01 -48.23,909.68 1216.77,974.68 -19.45,983.01 60.55,983.01 140.55,983.01 220.55,983.01 300.55,983.01 386.66,983.01 466.66,983.01 546.66,983.01 626.66,983.01 706.66,983.01 786.66,983.01 866.66,983.01 946.66,983.01 1026.66,983.01 1106.66,983.01
ID: J3.36
LED_0: J1.4 J3.38 T4.1 | length 776.9
  Top Layer w6: J1.4@741.03,738.02 741.03,675.43 801.77,614.68 876.77,614.68 916.77,574.68 916.77,324.68 886.77,294.68 886.77,229.68 886.77,219.68 v1(841.77,174.68)
  Bottom Layer w6: v1(841.77,174.68) 851.77,174.68 858.26,168.19 J3.38@858.27,121.65
LED_1: J3.40 SB2.1 T5.1 | length 424.1
  Top Layer w6: v1(956.77,376.68) T5.1@989.06,376.68 ; SB2.1@956.77,442.39 956.77,435.51 989.06,403.22 989.06,379.39 T5.1@991.77,376.68
  Bottom Layer w6: J3.40@889.76,121.65 889.76,167.68 906.77,184.68 941.77,184.68 966.77,209.68 966.77,366.68 v1(956.77,376.68)
NetJ2_11: J2.11 SB1.2 | length 543.6
  Top Layer w6: v1(1025,500) 1026.77,498.23 SB1.2@1026.77,466.98
  Bottom Layer w6: J2.11@701.67,738.02 701.67,689.78 791.77,599.68 850.37,599.68 916.77,533.29 916.77,490.44 938.34,468.87 1008.87,468.87 1025,485 v1(1025,500)
NetJ2_12: J2.12 SB2.2 | length 399.1
  Top Layer w6: SB2.2@956.77,466.98 956.91,467.13 v1(956.91,500.45)
  Bottom Layer w6: J2.12@741.04,738.02 741.04,685.41 801.77,624.68 867.7,624.68 956.91,535.47 v1(956.91,500.45)
NetJ2_13: J2.13 SB3.2 | length 544.1
  Top Layer w6: SB3.2@1101.77,442.39 SB3.2@1101.77,442.39 v1(1101.82,412.33)
  Bottom Layer w6: J2.13@780.41,738.02 780.41,691.05 821.77,649.68 884.51,649.68 988.31,545.89 1019.79,545.89 1064.29,501.39 1064.29,449.86 v1(1101.82,412.33)
NetJ2_14: J2.14 SB4.2 | length 561.2
  Top Layer w6: v1(1171.74,413.83) SB4.2@1171.77,442.39
  Bottom Layer w6: J2.14@819.78,738.02 819.78,691.68 831.77,679.68 905.88,679.68 995.39,590.17 1028.26,590.17 1101.45,516.98 1101.45,484.11 v1(1171.74,413.83)
NetJ2_15: J2.15 SB5.2 | length 261.6
  Top Layer w15: SB5.2@1030.41,693.59 1030.04,693.96 1030.04,738.15 1030.22,738.33 1030.22,739.04 v1(1030.41,739.23)
  Bottom Layer w20: J2.15@859.15,738.02 859.15,713.68 868.15,704.68 916.77,704.68 947.41,735.32 v1@1034.07,735.32
P3V3D: J1.1 J3.01 SB5.1
  other v1: 986.77,674.68 986.77,704.68
SCL33: J1.3 J3.32 SB3.1 | length 1075
  Top Layer w6: J1.3@780.41,738.02 780.4,676.05 821.77,634.68 886.77,634.68 996.77,524.68 1071.77,524.68 1101.77,494.68 SB3.1@1101.77,466.98 1075.07,466.98 1066.77,458.68 1066.77,319.68 1020.13,273.05 v1(941.77,273.05)
  Bottom Layer w6: J3.32@763.78,121.65 763.78,166.69 826.77,229.68 898.41,229.68 v1(941.77,273.05)
SDA33: J1.2 J3.34 SB4.1 | length 1121.8
  Top Layer w6: J1.2@819.78,738.02 819.78,681.68 851.77,649.68 901.77,649.68 1006.77,544.68 1131.77,544.68 1171.77,504.68 SB4.1@1171.77,466.98 1144.07,466.98 1136.77,459.68 1136.77,414.68 1091.77,369.68 1091.77,314.68 1021.77,244.68 956.77,244.68 v1(941.77,229.68)
  Bottom Layer w6: J3.34@795.28,121.65 795.27,163.18 836.77,204.68 916.77,204.68 v1(941.77,229.68)
pads on no net: J3. J3.02 J3.03 J3.04 J3.08 J3.10 J3.25 J3.27 J3.35 J3.37 J3.39

## Polygon pours and split planes (outlines as drawn)
GND on Top Layer "TOP-GND" (solid, pour order 0): -79.01,961.01 -78.82,965.36 -78.25,969.68 -77.31,973.94 -76,978.1 -74.33,982.14 -72.31,986.01 -69.97,989.68 -67.31,993.14 -64.37,996.36 -61.15,999.3 -57.69,1001.97 -54.01,1004.3 -50.14,1006.32 -46.11,1007.99 -41.95,1009.3 -37.7,1010.24 -33.37,1010.81 -29.01,1011.01 746.77,1011.01 1210.11,1011.01 1214.47,1010.81 1218.79,1010.24 1223.05,1009.3 1227.21,1007.99 1231.24,1006.32 1235.11,1004.3 1238.79,1001.97 1242.25,999.3 1245.46,996.36 1248.41,993.14 1251.06,989.68 1253.41,986.01 1255.42,982.14 1257.09,978.1 1258.4,973.94 1259.35,969.68 1259.92,965.36 1260.11,961.01 1260.11,-188.99 1259.92,-193.36 1259.35,-197.68 1258.4,-201.94 1257.09,-206.1 1255.42,-210.12 1253.41,-213.99 1251.06,-217.68 1248.41,-221.14 1245.46,-224.35 1242.25,-227.3 1238.79,-229.95 1235.11,-232.3 1231.24,-234.31 1227.21,-235.98 1223.05,-237.3 1218.79,-238.24 1214.47,-238.81 1210.11,-238.99 786.77,-238.99 -29.01,-238.99 -33.37,-238.81 -37.7,-238.24 -41.95,-237.3 -46.11,-235.98 -50.14,-234.31 -54.01,-232.3 -57.69,-229.95 -61.15,-227.3 -64.37,-224.35 -67.31,-221.14 -69.97,-217.68 -72.31,-213.99 -74.33,-210.12 -76,-206.1 -77.31,-201.94 -78.25,-197.68 -78.82,-193.36 -79.01,-188.99 -79.01,961.01
GND on Bottom Layer "BOTTOM-GND" (solid, pour order 3): -79.01,961.01 -78.82,965.36 -78.25,969.68 -77.31,973.94 -76,978.1 -74.33,982.14 -72.31,986.01 -69.97,989.68 -67.31,993.14 -64.37,996.36 -61.15,999.3 -57.69,1001.97 -54.01,1004.3 -50.14,1006.32 -46.11,1007.99 -41.95,1009.3 -37.7,1010.24 -33.37,1010.81 -29.01,1011.01 746.77,1011.01 1210.11,1011.01 1214.47,1010.81 1218.79,1010.24 1223.05,1009.3 1227.21,1007.99 1231.24,1006.32 1235.11,1004.3 1238.79,1001.97 1242.25,999.3 1245.46,996.36 1248.41,993.14 1251.06,989.68 1253.41,986.01 1255.42,982.14 1257.09,978.1 1258.4,973.94 1259.35,969.68 1259.92,965.36 1260.11,961.01 1260.11,-188.99 1259.92,-193.36 1259.35,-197.68 1258.4,-201.94 1257.09,-206.1 1255.42,-210.12 1253.41,-213.99 1251.06,-217.68 1248.41,-221.14 1245.46,-224.35 1242.25,-227.3 1238.79,-229.95 1235.11,-232.3 1231.24,-234.31 1227.21,-235.98 1223.05,-237.3 1218.79,-238.24 1214.47,-238.81 1210.11,-238.99 786.77,-238.99 -29.01,-238.99 -33.37,-238.81 -37.7,-238.24 -41.95,-237.3 -46.11,-235.98 -50.14,-234.31 -54.01,-232.3 -57.69,-229.95 -61.15,-227.3 -64.37,-224.35 -67.31,-221.14 -69.97,-217.68 -72.31,-213.99 -74.33,-210.12 -76,-206.1 -77.31,-201.94 -78.25,-197.68 -78.82,-193.36 -79.01,-188.99 -79.01,961.01
GND on L03_GND "L03_GND-GND" (solid, pour order 2): -79.01,961.01 -78.82,965.36 -78.25,969.68 -77.31,973.94 -76,978.1 -74.33,982.14 -72.31,986.01 -69.97,989.68 -67.31,993.14 -64.37,996.36 -61.15,999.3 -57.69,1001.97 -54.01,1004.3 -50.14,1006.32 -46.11,1007.99 -41.95,1009.3 -37.7,1010.24 -33.37,1010.81 -29.01,1011.01 746.77,1011.01 1210.11,1011.01 1214.47,1010.81 1218.79,1010.24 1223.05,1009.3 1227.21,1007.99 1231.24,1006.32 1235.11,1004.3 1238.79,1001.97 1242.25,999.3 1245.46,996.36 1248.41,993.14 1251.06,989.68 1253.41,986.01 1255.42,982.14 1257.09,978.1 1258.4,973.94 1259.35,969.68 1259.92,965.36 1260.11,961.01 1260.11,-188.99 1259.92,-193.36 1259.35,-197.68 1258.4,-201.94 1257.09,-206.1 1255.42,-210.12 1253.41,-213.99 1251.06,-217.68 1248.41,-221.14 1245.46,-224.35 1242.25,-227.3 1238.79,-229.95 1235.11,-232.3 1231.24,-234.31 1227.21,-235.98 1223.05,-237.3 1218.79,-238.24 1214.47,-238.81 1210.11,-238.99 786.77,-238.99 -29.01,-238.99 -33.37,-238.81 -37.7,-238.24 -41.95,-237.3 -46.11,-235.98 -50.14,-234.31 -54.01,-232.3 -57.69,-229.95 -61.15,-227.3 -64.37,-224.35 -67.31,-221.14 -69.97,-217.68 -72.31,-213.99 -74.33,-210.12 -76,-206.1 -77.31,-201.94 -78.25,-197.68 -78.82,-193.36 -79.01,-188.99 -79.01,961.01
GND on L02_GND "L02_GND-GND" (solid, pour order 1): -79.01,961.01 -78.82,965.36 -78.25,969.68 -77.31,973.94 -76,978.1 -74.33,982.14 -72.31,986.01 -69.97,989.68 -67.31,993.14 -64.37,996.36 -61.15,999.3 -57.69,1001.97 -54.01,1004.3 -50.14,1006.32 -46.11,1007.99 -41.95,1009.3 -37.7,1010.24 -33.37,1010.81 -29.01,1011.01 746.77,1011.01 1210.11,1011.01 1214.47,1010.81 1218.79,1010.24 1223.05,1009.3 1227.21,1007.99 1231.24,1006.32 1235.11,1004.3 1238.79,1001.97 1242.25,999.3 1245.46,996.36 1248.41,993.14 1251.06,989.68 1253.41,986.01 1255.42,982.14 1257.09,978.1 1258.4,973.94 1259.35,969.68 1259.92,965.36 1260.11,961.01 1260.11,-188.99 1259.92,-193.36 1259.35,-197.68 1258.4,-201.94 1257.09,-206.1 1255.42,-210.12 1253.41,-213.99 1251.06,-217.68 1248.41,-221.14 1245.46,-224.35 1242.25,-227.3 1238.79,-229.95 1235.11,-232.3 1231.24,-234.31 1227.21,-235.98 1223.05,-237.3 1218.79,-238.24 1214.47,-238.81 1210.11,-238.99 786.77,-238.99 -29.01,-238.99 -33.37,-238.81 -37.7,-238.24 -41.95,-237.3 -46.11,-235.98 -50.14,-234.31 -54.01,-232.3 -57.69,-229.95 -61.15,-227.3 -64.37,-224.35 -67.31,-221.14 -69.97,-217.68 -72.31,-213.99 -74.33,-210.12 -76,-206.1 -77.31,-201.94 -78.25,-197.68 -78.82,-193.36 -79.01,-188.99 -79.01,961.01

## Keep-outs
Top Layer:
  drawing of 27 lines, arcs and shapes, not listed
L02_GND:
  region: 810.85,490.51 810.85,528.55 810.93,530.3 811.16,532.02 811.54,533.72 812.06,535.39 812.73,537.01 813.53,538.55 814.47,540.02 815.53,541.41 816.71,542.69 818,543.86 819.38,544.94 820.85,545.86 822.4,546.68 824.01,547.35 825.68,547.86 827.38,548.26 829.11,548.47 830.85,548.55 832.6,548.47 834.33,548.26 836.03,547.86 837.69,547.35 839.31,546.68 840.85,545.86 842.33,544.94 843.71,543.86 845,542.69 846.17,541.41 847.24,540.02 848.17,538.55 848.98,537.01 849.65,535.39 850.17,533.72 850.55,532.02 850.78,530.3 850.85,528.55 850.85,490.51 850.78,488.76 850.55,487.02 850.17,485.32 849.65,483.66 848.98,482.05 848.17,480.51 847.24,479.02 846.17,477.64 845,476.36 843.71,475.18 842.33,474.11 840.85,473.18 839.31,472.36 837.69,471.7 836.03,471.18 834.33,470.8 832.6,470.59 830.85,470.51 829.11,470.59 827.38,470.8 825.68,471.18 824.01,471.7 822.4,472.36 820.85,473.18 819.38,474.11 818,475.18 816.71,476.36 815.53,477.64 814.47,479.02 813.53,480.51 812.73,482.05 812.06,483.66 811.54,485.32 811.16,487.02 810.93,488.76 810.85,490.51
  region: 694.85,435.51 694.85,473.55 694.93,475.3 695.16,477.02 695.54,478.72 696.06,480.39 696.73,482.01 697.53,483.55 698.47,485.02 699.53,486.41 700.71,487.69 702,488.86 703.38,489.94 704.85,490.86 706.4,491.68 708.01,492.35 709.68,492.86 711.38,493.26 713.11,493.47 714.85,493.55 716.6,493.47 718.33,493.26 720.03,492.86 721.69,492.35 723.31,491.68 724.85,490.86 726.33,489.94 727.71,488.86 729,487.69 730.17,486.41 731.24,485.02 732.17,483.55 732.98,482.01 733.65,480.39 734.17,478.72 734.55,477.02 734.78,475.3 734.85,473.55 734.85,435.51 734.78,433.76 734.55,432.02 734.17,430.32 733.65,428.66 732.98,427.05 732.17,425.51 731.24,424.02 730.17,422.64 729,421.36 727.71,420.18 726.33,419.11 724.85,418.18 723.31,417.36 721.69,416.7 720.03,416.18 718.33,415.8 716.6,415.59 714.85,415.51 713.11,415.59 711.38,415.8 709.68,416.18 708.01,416.7 706.4,417.36 704.85,418.18 703.38,419.11 702,420.18 700.71,421.36 699.53,422.64 698.47,424.02 697.53,425.51 696.73,427.05 696.06,428.66 695.54,430.32 695.16,432.02 694.93,433.76 694.85,435.51
  region: 452.44,697.65 478.46,697.65 478.46,778.39 452.44,778.39
  region: 382.56,-160.11 420.61,-160.11 422.36,-160.19 424.08,-160.41 425.79,-160.8 427.45,-161.32 429.06,-161.99 430.61,-162.78 432.07,-163.73 433.47,-164.78 434.74,-165.97 435.92,-167.26 436.99,-168.64 437.92,-170.11 438.73,-171.66 439.4,-173.27 439.92,-174.94 440.31,-176.64 440.54,-178.36 440.61,-180.11 440.54,-181.86 440.31,-183.59 439.92,-185.28 439.4,-186.95 438.73,-188.57 437.92,-190.11 436.99,-191.59 435.92,-192.97 434.74,-194.26 433.47,-195.43 432.07,-196.49 430.61,-197.43 429.06,-198.24 427.45,-198.91 425.79,-199.43 424.08,-199.81 422.36,-200.03 420.61,-200.11 382.56,-200.11 380.81,-200.03 379.08,-199.81 377.38,-199.43 375.72,-198.91 374.11,-198.24 372.56,-197.43 371.08,-196.49 369.71,-195.43 368.41,-194.26 367.23,-192.97 366.17,-191.59 365.23,-190.11 364.42,-188.57 363.76,-186.95 363.23,-185.28 362.86,-183.59 362.64,-181.86 362.56,-180.11 362.64,-178.36 362.86,-176.64 363.23,-174.94 363.76,-173.27 364.42,-171.66 365.23,-170.11 366.17,-168.64 367.23,-167.26 368.41,-165.97 369.71,-164.78 371.08,-163.73 372.56,-162.78 374.11,-161.99 375.72,-161.32 377.38,-160.8 379.08,-160.41 380.81,-160.19 382.56,-160.11
  region: 609.92,697.65 635.94,697.65 635.94,778.39 609.92,778.39
  region: 423.85,475.18 423.85,437.14 423.77,435.39 423.54,433.66 423.16,431.95 422.64,430.3 421.97,428.68 421.17,427.14 420.23,425.68 419.17,424.27 417.99,423.01 416.7,421.82 415.32,420.76 413.85,419.82 412.3,419.01 410.69,418.34 409.02,417.82 407.32,417.43 405.59,417.2 403.85,417.14 402.1,417.2 400.37,417.43 398.67,417.82 397.01,418.34 395.39,419.01 393.85,419.82 392.37,420.76 390.99,421.82 389.7,423.01 388.53,424.27 387.46,425.68 386.53,427.14 385.72,428.68 385.05,430.3 384.53,431.95 384.15,433.66 383.92,435.39 383.85,437.14 383.85,475.18 383.92,476.93 384.15,478.66 384.53,480.36 385.05,482.02 385.72,483.64 386.53,485.18 387.46,486.66 388.53,488.03 389.7,489.34 390.99,490.51 392.37,491.57 393.85,492.51 395.39,493.32 397.01,493.98 398.67,494.51 400.37,494.89 402.1,495.1 403.85,495.18 405.59,495.1 407.32,494.89 409.02,494.51 410.69,493.98 412.3,493.32 413.85,492.51 415.32,491.57 416.7,490.51 417.99,489.34 419.17,488.03 420.23,486.66 421.17,485.18 421.97,483.64 422.64,482.02 423.16,480.36 423.54,478.66 423.77,476.93 423.85,475.18
  region: 334.33,697.65 360.35,697.65 360.35,778.39 334.33,778.39
  region: 749.85,250.51 749.85,288.55 749.93,290.3 750.16,292.02 750.54,293.72 751.06,295.39 751.73,297.01 752.53,298.55 753.47,300.02 754.53,301.41 755.71,302.69 757,303.86 758.38,304.94 759.85,305.86 761.4,306.68 763.01,307.35 764.68,307.86 766.38,308.26 768.11,308.47 769.85,308.55 771.6,308.47 773.33,308.26 775.03,307.86 776.69,307.35 778.31,306.68 779.85,305.86 781.33,304.94 782.71,303.86 784,302.69 785.17,301.41 786.24,300.02 787.17,298.55 787.98,297.01 788.65,295.39 789.17,293.72 789.55,292.02 789.78,290.3 789.85,288.55 789.85,250.51 789.78,248.76 789.55,247.02 789.17,245.32 788.65,243.66 787.98,242.05 787.17,240.51 786.24,239.02 785.17,237.64 784,236.36 782.71,235.18 781.33,234.11 779.85,233.18 778.31,232.36 776.69,231.7 775.03,231.18 773.33,230.8 771.6,230.59 769.85,230.51 768.11,230.59 766.38,230.8 764.68,231.18 763.01,231.7 761.4,232.36 759.85,233.18 758.38,234.11 757,235.18 755.71,236.36 754.53,237.64 753.47,239.02 752.53,240.51 751.73,242.05 751.06,243.66 750.54,245.32 750.16,247.02 749.93,248.76 749.85,250.51
  region: 373.7,697.65 399.72,697.65 399.72,778.39 373.7,778.39
  region: 491.81,697.65 517.83,697.65 517.83,778.39 491.81,778.39
  region: 533.83,402.22 533.83,364.16 533.75,362.41 533.52,360.69 533.14,358.98 532.62,357.32 531.95,355.72 531.15,354.16 530.21,352.7 529.15,351.3 527.97,350.03 526.68,348.85 525.3,347.78 523.83,346.85 522.28,346.05 520.67,345.38 519,344.85 517.3,344.47 515.57,344.23 513.83,344.16 512.08,344.23 510.35,344.47 508.65,344.85 506.99,345.38 505.37,346.05 503.83,346.85 502.35,347.78 500.97,348.85 499.68,350.03 498.51,351.3 497.44,352.7 496.51,354.16 495.7,355.72 495.03,357.32 494.51,358.98 494.13,360.69 493.9,362.41 493.83,364.16 493.83,402.22 493.9,403.97 494.13,405.69 494.51,407.39 495.03,409.05 495.7,410.66 496.51,412.22 497.44,413.69 498.51,415.06 499.68,416.36 500.97,417.55 502.35,418.6 503.83,419.55 505.37,420.35 506.99,421.01 508.65,421.55 510.35,421.91 512.08,422.14 513.83,422.22 515.57,422.14 517.3,421.91 519,421.55 520.67,421.01 522.28,420.35 523.83,419.55 525.3,418.6 526.68,417.55 527.97,416.36 529.15,415.06 530.21,413.69 531.15,412.22 531.95,410.66 532.62,409.05 533.14,407.39 533.52,405.69 533.75,403.97 533.83,402.22
  region: 477.04,-160.11 515.09,-160.11 516.84,-160.19 518.56,-160.41 520.27,-160.8 521.93,-161.32 523.54,-161.99 525.09,-162.78 526.55,-163.73 527.95,-164.78 529.22,-165.97 530.4,-167.26 531.47,-168.64 532.4,-170.11 533.21,-171.66 533.88,-173.27 534.4,-174.94 534.79,-176.64 535.02,-178.36 535.09,-180.11 535.02,-181.86 534.79,-183.59 534.4,-185.28 533.88,-186.95 533.21,-188.57 532.4,-190.11 531.47,-191.59 530.4,-192.97 529.22,-194.26 527.95,-195.43 526.55,-196.49 525.09,-197.43 523.54,-198.24 521.93,-198.91 520.27,-199.43 518.56,-199.81 516.84,-200.03 515.09,-200.11 477.04,-200.11 475.29,-200.03 473.56,-199.81 471.86,-199.43 470.2,-198.91 468.59,-198.24 467.04,-197.43 465.56,-196.49 464.19,-195.43 462.89,-194.26 461.71,-192.97 460.65,-191.59 459.71,-190.11 458.9,-188.57 458.24,-186.95 457.71,-185.28 457.34,-183.59 457.12,-181.86 457.04,-180.11 457.12,-178.36 457.34,-176.64 457.71,-174.94 458.24,-173.27 458.9,-171.66 459.71,-170.11 460.65,-168.64 461.71,-167.26 462.89,-165.97 464.19,-164.78 465.56,-163.73 467.04,-162.78 468.59,-161.99 470.2,-161.32 471.86,-160.8 473.56,-160.41 475.29,-160.19 477.04,-160.11
  region: 571.53,-160.11 609.58,-160.11 611.33,-160.19 613.06,-160.41 614.76,-160.8 616.42,-161.32 618.04,-161.99 619.58,-162.78 621.05,-163.73 622.44,-164.78 623.72,-165.97 624.9,-167.26 625.97,-168.64 626.9,-170.11 627.71,-171.66 628.38,-173.27 628.9,-174.94 629.28,-176.64 629.51,-178.36 629.58,-180.11 629.51,-181.86 629.28,-183.59 628.9,-185.28 628.38,-186.95 627.71,-188.57 626.9,-190.11 625.97,-191.59 624.9,-192.97 623.72,-194.26 622.44,-195.43 621.05,-196.49 619.58,-197.43 618.04,-198.24 616.42,-198.91 614.76,-199.43 613.06,-199.81 611.33,-200.03 609.58,-200.11 571.53,-200.11 569.79,-200.03 568.06,-199.81 566.35,-199.43 564.69,-198.91 563.08,-198.24 561.53,-197.43 560.06,-196.49 558.68,-195.43 557.39,-194.26 556.21,-192.97 555.15,-191.59 554.21,-190.11 553.4,-188.57 552.74,-186.95 552.21,-185.28 551.83,-183.59 551.61,-181.86 551.53,-180.11 551.61,-178.36 551.83,-176.64 552.21,-174.94 552.74,-173.27 553.4,-171.66 554.21,-170.11 555.15,-168.64 556.21,-167.26 557.39,-165.97 558.68,-164.78 560.06,-163.73 561.53,-162.78 563.08,-161.99 564.69,-161.32 566.35,-160.8 568.06,-160.41 569.79,-160.19 571.53,-160.11
  region: 570.55,697.65 596.57,697.65 596.57,778.39 570.55,778.39
  region: 319.77,579.99 319.77,541.94 319.69,540.19 319.46,538.47 319.08,536.76 318.56,535.1 317.89,533.49 317.09,531.94 316.15,530.48 315.09,529.09 313.91,527.81 312.62,526.64 311.24,525.56 309.77,524.64 308.22,523.82 306.61,523.15 304.94,522.64 303.24,522.24 301.51,522.01 299.77,521.94 298.02,522.01 296.29,522.24 294.59,522.64 292.93,523.15 291.31,523.82 289.77,524.64 288.29,525.56 286.91,526.64 285.62,527.81 284.45,529.09 283.38,530.48 282.45,531.94 281.64,533.49 280.97,535.1 280.45,536.76 280.07,538.47 279.84,540.19 279.77,541.94 279.77,579.99 279.84,581.74 280.07,583.47 280.45,585.18 280.97,586.84 281.64,588.44 282.45,589.99 283.38,591.47 284.45,592.84 285.62,594.14 286.91,595.32 288.29,596.39 289.77,597.32 291.31,598.14 292.93,598.8 294.59,599.32 296.29,599.69 298.02,599.91 299.77,599.99 301.51,599.91 303.24,599.69 304.94,599.32 306.61,598.8 308.22,598.14 309.77,597.32 311.24,596.39 312.62,595.32 313.91,594.14 315.09,592.84 316.15,591.47 317.09,589.99 317.89,588.44 318.56,586.84 319.08,585.18 319.46,583.47 319.69,581.74 319.77,579.99